# Altium PCB piccolaPowerPCB.PcbDoc
Units mil, origin at the board's own origin, x right, y up, seen from the top; angles counter-clockwise.
Board outline 3149.61 x 3149.61 mil, 2 copper layers (Top Layer, Bottom Layer); 20 components, 18 nets, 60 pads, 3 vias.
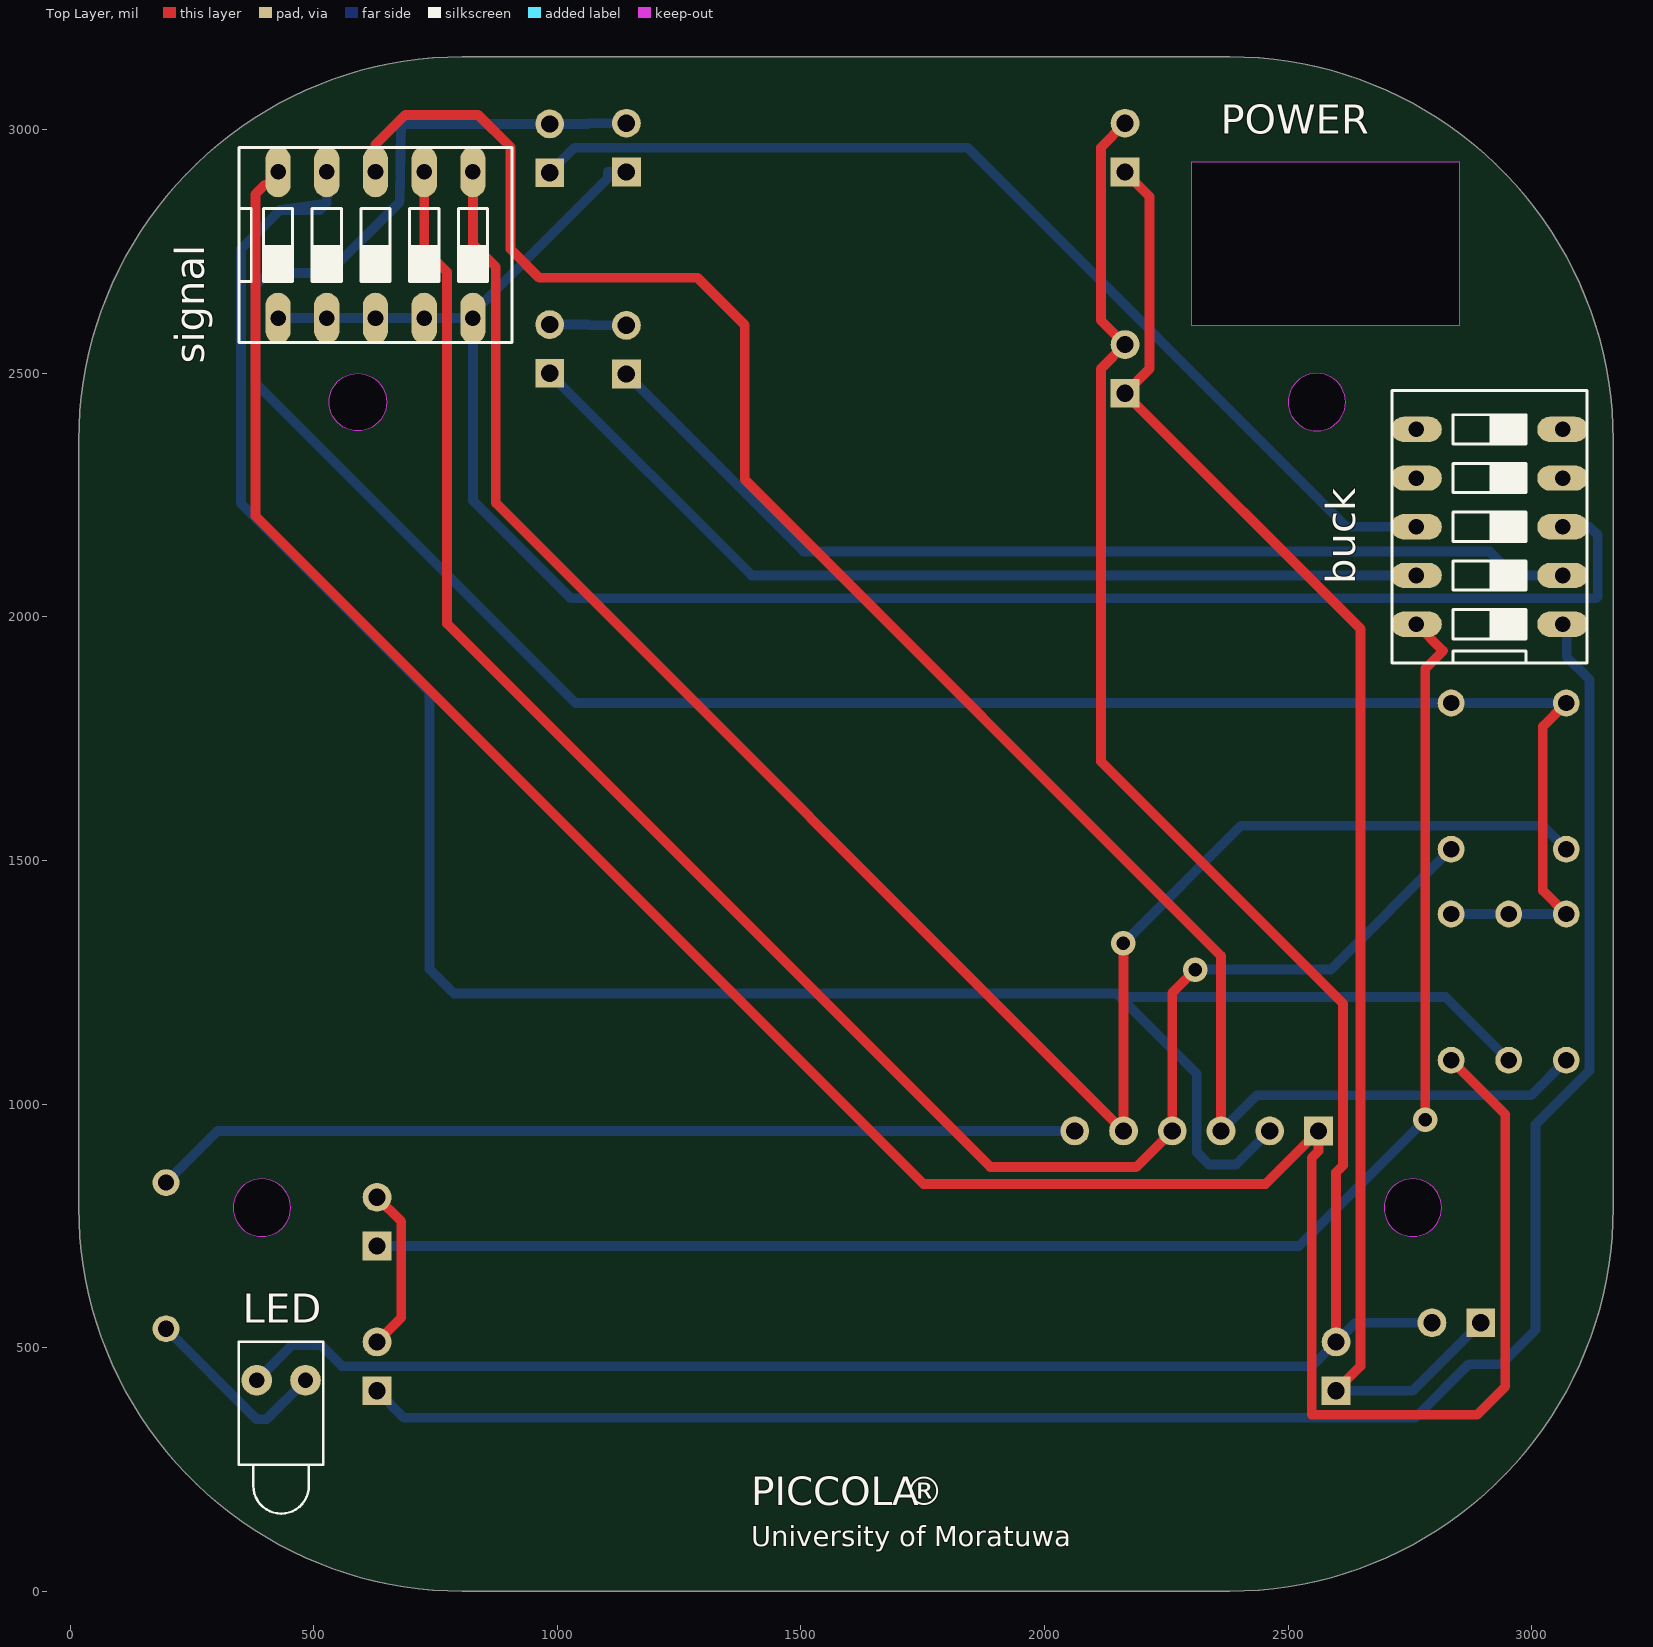
[diagram p0: Top Layer view]
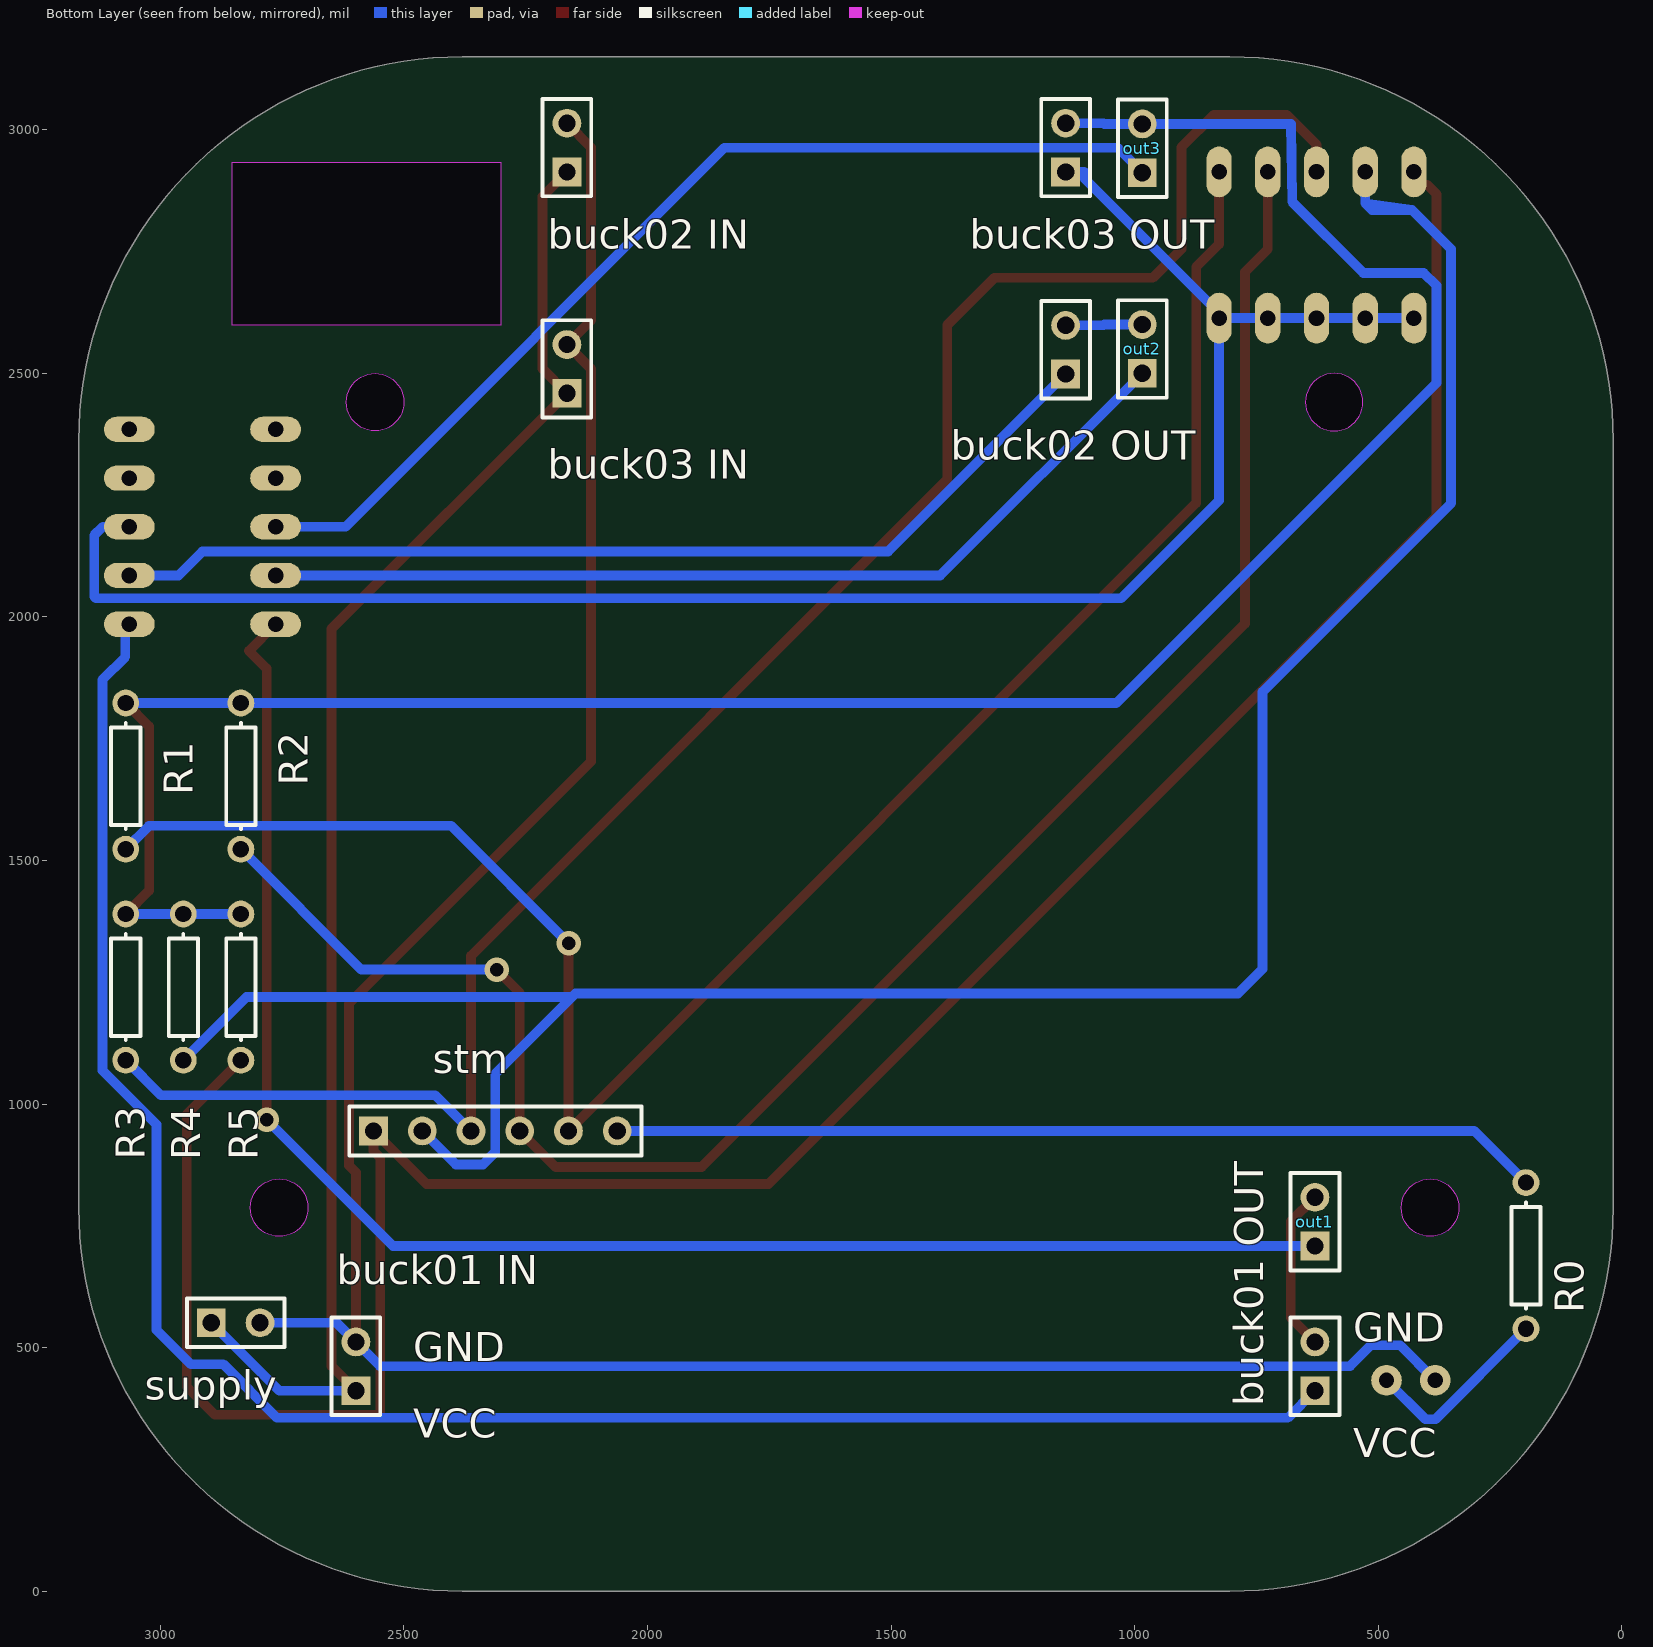
[diagram p1: Bottom Layer view, seen from below]

## Layer stack, top to bottom
Top Solder: solder mask 0.4, Solder Resist, Dk 3.5
Top Layer: signal copper 1.4
Dielectric 1: dielectric 12.6, FR-4, Dk 4.8
Bottom Layer: signal copper 1.4
Bottom Solder: solder mask 0.4, Solder Resist, Dk 3.5

## Board outline
17.72,787.56 ccw(c805.12,787.56) 805.12,0.16 2379.92,0.16 ccw(c2379.92,787.56) 3167.32,787.56 3167.32,2362.36 ccw(c2379.92,2362.36) 2379.92,3149.76 805.12,3149.76 ccw(c805.12,2362.36) 17.72,2362.36
cut-out: 2301.18,2598.58 2852.36,2598.58 2852.36,2933.23 2301.18,2933.23
cut-out: 334.65,787.4 ccw(c393.7,787.4) 393.7,728.35 ccw(c393.7,787.4) 452.76,787.4 ccw(c393.7,787.4) 393.7,846.46 ccw(c393.7,787.4)
cut-out: 2696.85,787.4 ccw(c2755.91,787.4) 2755.91,728.35 ccw(c2755.91,787.4) 2814.96,787.4 ccw(c2755.91,787.4) 2755.91,846.46 ccw(c2755.91,787.4)
cut-out: 2500,2440.94 ccw(c2559.06,2440.94) 2559.06,2381.89 ccw(c2559.06,2440.94) 2618.11,2440.94 ccw(c2559.06,2440.94) 2559.06,2500 ccw(c2559.06,2440.94)
cut-out: 590.55,2381.89 cw(c590.55,2440.94) 531.5,2440.94 cw(c590.55,2440.94) 590.55,2500 cw(c590.55,2440.94) 649.61,2440.94 cw(c590.55,2440.94)

## Design rules (kind name [scope] priority, off if disabled: settings)
Clearance [All] p1: gap=10 ignorepadtopadclearanceinfootprint=FALSE except(0: Arc-Hole Track-Hole SMDPad-Hole THPad-Hole Via-Hole Fill-Hole Poly-Hole Region-Hole Text-Hole)
PolygonConnect [All] p1: connectstyle=Relief reliefconductorwidth=10 reliefentries=4 polygonreliefangle="90 Angle" airgapwidth=10
RoutingVias [All] p1: holewidth=28 width=50 viastyle="Through Hole" minholewidth=28 minwidth=50 maxholewidth=28 maxwidth=50
SolderMaskExpansion [All] p1: expansion=4
Width [All] p1: maxlimit=30 minlimit=15 preferedwidth=20
30 further rules are at their usual default settings.

## Components (designator, comment, footprint, x,y, rotation, side; value= is the part's Value field where it differs from the comment)
buck "DS05" *DS-05 2913.39,2185.04 r90 top
"buck01 IN" "Header 2" HDR1X2 2598.43,411.81 r90 bottom
"buck01 OUT" "Header 2" HDR1X2 629.92,411.81 r90 bottom
"buck02 IN" "Header 2" HDR1X2 2165.35,2913.39 r90 bottom
"buck02 OUT" "Header 2" HDR1X2 1141.73,2498.43 r90 bottom
"buck03 IN" "Header 2" HDR1X2 2165.35,2459.06 r90 bottom
"buck03 OUT" "Header 2" HDR1X2 1141.73,2913.39 r90 bottom
LED "LED1" LED-1 433.07,433.07 r270 top
out1 "Header 2" HDR1X2 629.92,708.66 r90 bottom
out2 "Header 2" HDR1X2 984.25,2500 r90 bottom
out3 "Header 2" HDR1X2 984.25,2911.81 r90 bottom
R0 "3.3k" AXIAL-0.3 196.85,688.98 r270 bottom value=3.3K (schematic designator R?)
R1 "Res1" AXIAL-0.3 3070.87,1673.23 r90 bottom value=1K
R2 "Res1" AXIAL-0.3 2834.65,1673.23 r90 bottom value=1K
R3 "Res1" AXIAL-0.3 3070.87,1240.16 r90 bottom value=1K
R4 "Res1" AXIAL-0.3 2952.76,1240.16 r90 bottom value=1K
R5 "10K" AXIAL-0.3 2834.65,1240.16 r90 bottom value=1K
signal "DS05" *DS-05 626.77,2763.39 r0 top
stm "" HDR1X6 2562.2,944.88 r180 bottom
supply "Header 2" HDR1X2 2895.28,551.18 r180 bottom

## Footprints (in the part's own frame and the unit in brackets; to place one, negate y for a bottom-side part, rotate by r counter-clockwise, add the part's x,y. Pads: shape width x height; smd on the part's side, far side on the other; paste and mask are expansions set on the pad)
*DS-05 [mil]
  oval 52x104 hole 32: 1(-200,-150) 2(-100,-150) 3(0,-150) 4(100,-150) 5(200,-150) 6(200,150) 7(100,150) 8(0,150) 9(-100,150) 10(-200,150)
  silkscreen extent -280,-200 280,200
AXIAL-0.3 [mm] "Axial Device, Thru-Hole; 2 Leads; 0.3 in Pin Spacing"
  round 1.4 hole 0.85: 1(-3.81,0) 2(3.81,0)
  silkscreen extent -2.77,-0.76 2.77,0.76
HDR1X2 [mm] "Connector; Header; 2 Position"
  rect 1.5x1.5 hole 0.9: 1(0,0)
  round 1.5 hole 0.9: 2(2.54,0)
  silkscreen extent -1.27,-1.27 3.81,1.27
HDR1X6 [mm] "Connector; Header; 6 Position"
  rect 1.5x1.5 hole 0.9: 1(0,0)
  round 1.5 hole 0.9: 2(2.54,0) 3(5.08,0) 4(7.62,0) 5(10.16,0) 6(12.7,0)
  silkscreen extent -1.27,-1.27 13.97,1.27
LED-1 [mm] "LED; 2 Leads"
  round 1.6 hole 0.8: 1(0,1.27) 2(0,-1.27)
  silkscreen extent -2,-2.2 6.95,2.2

## Part data
buck signal: "Standard Dip Switch, Raised Actuator, 5 Position, Top Tape Sealed", Package=None, Availability=Unavailable, MF="APEM Inc.", MP=DS05, Price=None, SnapEDA_Link=https://www.snapeda.com/parts/DS05/APEM%20Inc./view-part/?ref=snap
"buck01 IN" "buck01 OUT" "buck02 IN" "buck02 OUT" "buck03 IN" "buck03 OUT" out1 out2 out3 supply: "Header, 2-Pin", LatestRevisionDate=17-Jul-2002, LatestRevisionNote="Re-released for DXP Platform.", Publisher="Altium Limited"
LED: "Typical RED GaAs LED", LatestRevisionDate=08-Jul-2005, LatestRevisionNote="Mech Layer 1 removed.", PackageDescription="LED; 2 Leads", PackageReference=LED-1, Published=8-Jun-2000, Publisher="Altium Limited"
R0 R5: library part Res1, "Resistor", LatestRevisionDate=17-Jul-2002, LatestRevisionNote="Re-released for DXP Platform.", PackageDescription="Axial Device, Thru-Hole; 2 Leads; 0.3 in Pin Spacing", PackageReference=AXIAL-0.3, Published=8-Jun-2000, Publisher="Altium Limited"
R1 R2 R3 R4: "Resistor", LatestRevisionDate=17-Jul-2002, LatestRevisionNote="Re-released for DXP Platform.", PackageDescription="Axial Device, Thru-Hole; 2 Leads; 0.3 in Pin Spacing", PackageReference=AXIAL-0.3, Published=8-Jun-2000, Publisher="Altium Limited"
stm: library part "Header 6", "Header, 6-Pin", LatestRevisionDate=17-Jul-2002, LatestRevisionNote="Re-released for DXP Platform.", Publisher="Altium Limited"

## Via types
v1: diameter 50, hole 28, Top Layer to Bottom Layer, 3 vias

## Nets (pads, with @x,y where several pads share a name; then routed paths per layer and width w, separated by ;. In a path a pad name is that pad's centre, name@x,y a point inside that pad or via, vN(x,y) a via of type N, cw(c..) or ccw(c..) an arc to the next point about the centre after c; other vN are vias at no path point)
GND: "buck01 IN.2" "buck02 IN.2" "buck03 IN.2" LED.2 supply.2 | length 5271.8
  Top Layer w20: 2165.35,3013.39 2115.72,2963.75 2115.72,2608.69 2165.35,2559.06 2115.72,2509.42 2115.72,1703.16 2612.72,1206.16 2612.72,874.16 2598.42,859.87 2598.42,511.81
  Bottom Layer w20: LED.2 455.16,505.16 514.72,505.16 557.72,462.16 2548.77,462.16 2598.42,511.81 2637.79,551.18 supply.2
"Netbuck01 OUT_1": "buck01 OUT.1" buck.1 | length 3998.1
  Bottom Layer w20: 629.92,411.81 685.57,356.16 2760.72,356.16 2870.72,466.16 2937.72,466.16 3007.72,536.16 3007.72,958.16 3118.72,1069.16 3118.72,1871.16 3071.72,1918.16 3071.72,1985.04 buck.1
"Netbuck01 OUT_2": "buck01 OUT.2" out1.2 | length 338.1
  Top Layer w20: 629.92,511.81 679.72,561.61 679.72,758.87 out1.2
"Netbuck02 OUT_1": "buck02 OUT.1" buck.2 | length 2092.9
  Bottom Layer w20: 1141.73,2498.43 1506,2134.16 2913.72,2134.16 2962.83,2085.04 buck.2
"Netbuck02 OUT_2": "buck02 OUT.2" out2.2 | length 158.1
  Bottom Layer w20: out2.2 1061.72,2600 1063.29,2598.43 1141.73,2598.43
"Netbuck03 OUT_1": "buck03 OUT.1" buck.3 signal.1 signal.2 signal.3 signal.4 signal.5 | length 3825.9
  Bottom Layer w20: signal.1 signal.2 signal.3 signal.4 signal.5 ; 1141.73,2913.39 1103.72,2913.39 1103.72,2901.1 826.77,2624.16 signal.5 ; buck.3 3118.33,2185.04 3135.72,2167.66 3135.72,2042.16 3131.72,2038.16 1027.72,2038.16 826.77,2239.1 signal.5
"Netbuck03 OUT_2": "buck03 OUT.2" out3.2 R1.2 R2.2 R3.2 R4.2 R5.2 | length 4861.4
  Top Layer w20: R3.2 3022.72,1438.31 3022.72,1775.08 R1.2
  Bottom Layer w20: 1141.73,3013.39 1063.29,3013.39 1061.72,3011.81 out3.2 679.37,3011.81 676.72,2852.16 530.72,2706.16 406.72,2706.16 380.72,2680.16 380.72,2480.16 1037.65,1823.23 R2.2 R1.2 ; R5.2 R4.2 R3.2
Netbuck_8: buck.8 out3.1 | length 2122.7
  Bottom Layer w20: out3.1 1035.6,2963.16 1841.72,2963.16 2619.83,2185.04 buck.8
Netbuck_9: buck.9 out2.1 | length 1951
  Bottom Layer w20: out2.1 1399.21,2085.04 buck.9
Netbuck_10: buck.10 out1.1 | length 3313.8
  Top Layer w20: buck.10 2817.99,1930.43 2781.72,1894.16 v1(2781.72,968.16)
  Bottom Layer w20: out1.1 2522.22,708.66 v1(2781.72,968.16)
NetLED_1: LED.1 R0.2 | length 396.3
  Bottom Layer w20: R0.2 382.67,353.16 403.16,353.16 LED.1
NetR1_1: R1.1 signal.6 stm.5 | length 3936
  Top Layer w20: signal.6 826.77,2765.1 873.72,2718.16 873.72,2233.37 stm.5 2162.2,1329.67 v1(2161.72,1330.16)
  Bottom Layer w20: v1(2161.72,1330.16) 2402.72,1571.16 3022.94,1571.16 R1.1
NetR2_1: R2.1 signal.7 stm.4 | length 3905.8
  Top Layer w20: signal.7 726.77,2755.1 773.72,2708.16 773.72,1986.16 1888.72,871.16 2188.48,871.16 stm.4 2262.2,1228.65 v1(2309.72,1276.16)
  Bottom Layer w20: v1(2309.72,1276.16) 2587.58,1276.16 R2.1
NetR3_1: R3.1 signal.8 stm.3 | length 3968
  Top Layer w20: signal.8 626.77,2969.21 687.72,3030.16 837.72,3030.16 903.72,2964.16 903.72,2755.16 962.72,2696.16 1287.72,2696.16 1384.72,2599.16 1384.72,2281.97 2362.2,1304.48 stm.3
  Bottom Layer w20: stm.3 2435.48,1018.16 2998.87,1018.16 R3.1
NetR4_1: R4.1 signal.9 stm.2 | length 4879.5
  Bottom Layer w20: signal.9 526.77,2849.21 ; stm.2 2393.48,876.16 2337.72,876.16 2312.68,901.2 2312.68,1062.16 2154.94,1219.89 ; R4.1 2823.02,1219.89 2154.94,1219.89 ; 430.72,2835.16 526.77,2849.21 ; 430.72,2835.16 350.72,2755.16 350.72,2233.16 737.72,1846.16 737.72,1277.16 787.72,1227.16 2147.68,1227.16 2154.94,1219.89 ; 430.72,2835.16 512.72,2835.16 526.77,2849.21
NetR5_1: R5.1 signal.10 stm.1 | length 5260.6
  Top Layer w20: signal.10 426.77,2887.16 400.22,2887.16 380.72,2867.66 380.72,2207.16 1751.72,836.16 2453.48,836.16 stm.1 2562.2,903.65 2548.72,890.16 2548.72,362.16 2887.72,362.16 2945.72,420.16 2945.72,979.09 R5.1
NetR?_1: R0.1 stm.6 | length 1909.2
  Bottom Layer w20: R0.1 302.76,944.88 stm.6
VCC: "buck01 IN.1" "buck02 IN.1" "buck03 IN.1" supply.1 | length 3118.9
  Top Layer w20: 2165.35,2913.39 2215.72,2863.02 2215.72,2509.42 2165.35,2459.06 2648.72,1975.69 2648.72,462.1 2598.42,411.81
  Bottom Layer w20: 2598.42,411.81 2755.91,411.81 supply.1
pads on no net: buck.4 buck.5 buck.6 buck.7

## Silkscreen, mask and mechanical layers (free items; w line width, h text height)
Top Overlay:
  text "POWER" at 2362.2,2992.13 h60
  text "PICCOLA" at 1397.64,157.48 h100
  text "®" at 1712.6,157.48 h100
  text "University of Moratuwa" at 1397.64,78.74 h70
Bottom Overlay:
  text "GND" at 551.18,511.81 h60
  text "GND" at 2480.31,472.44 h60
  text "VCC" at 2480.31,314.96 h60
  text "VCC" at 551.18,275.59 h60
Mechanical 1:
  circle w0.5: c393.7,787.4 r59.06
  circle w0.5: c2755.91,787.4 r59.06
  circle w0.5: c590.55,2440.94 r59.06
  circle w0.5: c2559.06,2440.94 r59.06
  lines w0.5: 17.72,787.56 ccw(c805.12,787.56) 805.12,0.16 2379.92,0.16 ccw(c2379.92,787.56) 3167.32,787.56 3167.32,2362.36 ccw(c2379.92,2362.36) 2379.92,3149.76 805.12,3149.76 ccw(c805.12,2362.36) 17.72,2362.36 17.72,787.56 ; 2301.18,2598.58 2301.18,2933.23 2852.36,2933.23 2852.36,2598.58 2301.18,2598.58

## Text inside footprints (layer, text, board x,y; h text height)
buck: Mechanical 4 "1" at 3058.47,1974.66 h73.82 r90; Mechanical 4 "2" at 3058.31,2064.97 h73.82 r90; Mechanical 4 "3" at 3058.3,2165.03 h73.82 r90; Mechanical 4 "4" at 3058.39,2265.14 h73.82 r90; Mechanical 4 "5" at 3058.29,2365.13 h73.82 r90; Mechanical 4 "ON" at 2828.1,1954.74 h73.82 r90; Mechanical 4 "1" at 3058.47,1974.66 h73.82 r90; Mechanical 4 "2" at 3058.31,2064.97 h73.82 r90; Mechanical 4 "3" at 3058.3,2165.03 h73.82 r90; Mechanical 4 "4" at 3058.39,2265.14 h73.82 r90; Mechanical 4 "5" at 3058.29,2365.13 h73.82 r90; Mechanical 4 "ON" at 2828.1,1954.74 h73.82 r90
signal: Mechanical 4 "1" at 416.39,2618.3 h73.82; Mechanical 4 "2" at 506.7,2618.46 h73.82; Mechanical 4 "3" at 606.76,2618.47 h73.82; Mechanical 4 "4" at 706.87,2618.38 h73.82; Mechanical 4 "5" at 806.86,2618.48 h73.82; Mechanical 4 "ON" at 396.47,2848.67 h73.82; Mechanical 4 "1" at 416.39,2618.3 h73.82; Mechanical 4 "2" at 506.7,2618.46 h73.82; Mechanical 4 "3" at 606.76,2618.47 h73.82; Mechanical 4 "4" at 706.87,2618.38 h73.82; Mechanical 4 "5" at 806.86,2618.48 h73.82; Mechanical 4 "ON" at 396.47,2848.67 h73.82